# Altium PCB libs.PcbDoc
Units mil, origin at the board's own origin, x right, y up, seen from the top; angles counter-clockwise.
Board outline 2362.2 x 1574.8 mil, 2 copper layers (Top Layer, Bottom Layer); 7 components, 9 nets, 22 pads, 0 vias.
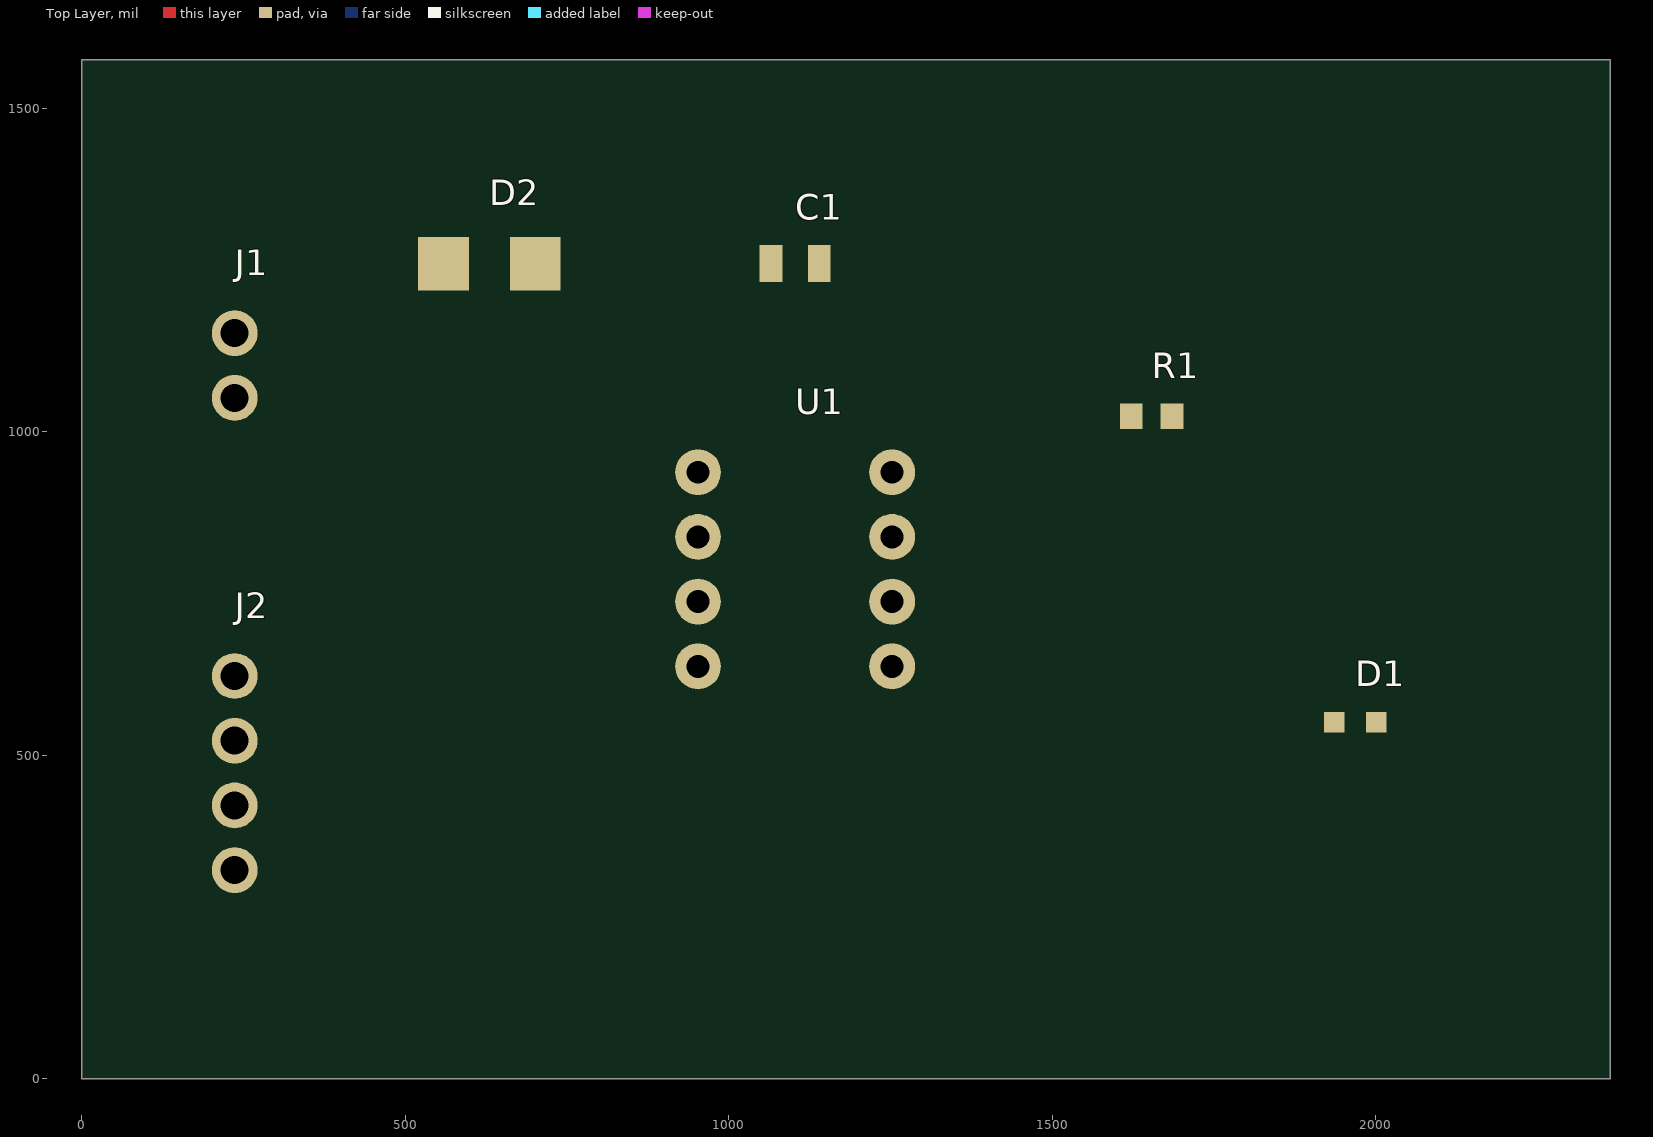
[diagram p0: Top Layer view]
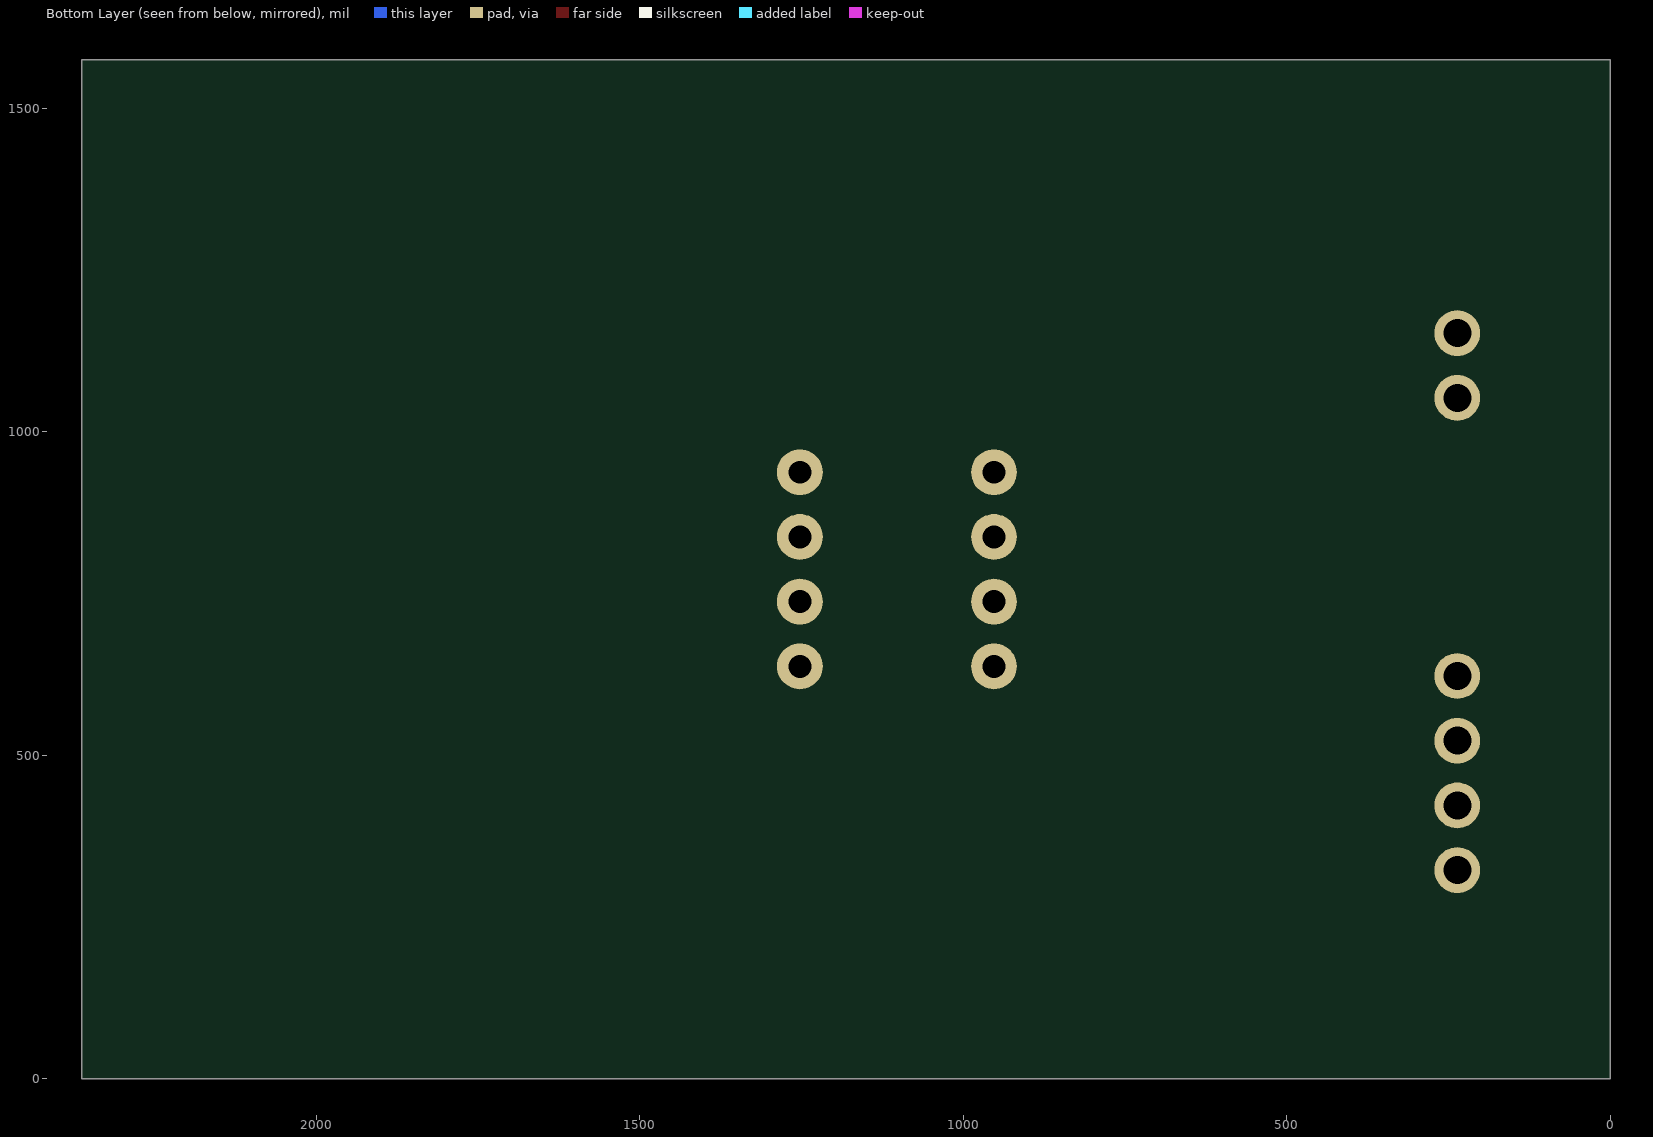
[diagram p1: Bottom Layer view, seen from below]

## Layer stack, top to bottom
Top Solder: solder mask 0.4, Solder Resist, Dk 3.5
Top Layer: signal copper 1.4
Dielectric 1: dielectric 12.6, FR-4, Dk 4.8
Bottom Layer: signal copper 1.4
Bottom Solder: solder mask 0.4, Solder Resist, Dk 3.5

## Board outline
0,1574.8 2362.2,1574.8 2362.2,0 0,0

## Components (designator, comment, footprint, x,y, rotation, side; value= is the part's Value field where it differs from the comment)
C1 "100n" Chip_0805 1102.36,1259.84 r0 top
D1 "red" LED0603_Kingbright_APT1608SURCK 1968.5,551.18 r0 top
D2 "rectifier" DO214AC 629.92,1259.84 r0 top
J1 "SUPPLY" Header_1x2_P2.54 236.22,1102.36 r0 top
J2 "PORT" Header_1x4_P2.54 236.22,472.44 r0 top
R1 "330" Chip_0603 1653.54,1023.62 r0 top
U1 "MCU" DIP8_Microchip_P 1102.36,787.4 r0 top locked

## Footprints (in the part's own frame and the unit in brackets; to place one, negate y for a bottom-side part, rotate by r counter-clockwise, add the part's x,y. Pads: shape width x height; smd on the part's side, far side on the other; paste and mask are expansions set on the pad)
Chip_0603 [mm]
  rect 0.9x1 smd: 1(-0.8,0) 2(0.8,0)
Chip_0805 [mm]
  rect 0.9x1.45 smd: 1(-0.95,0) 2(0.95,0)
DIP8_Microchip_P [mm]
  round 1.8 hole 0.9: 1(-3.81,-3.81) 2(-3.81,-1.27) 3(-3.81,1.27) 4(-3.81,3.81) 5(3.81,3.81) 6(3.81,1.27) 7(3.81,-1.27) 8(3.81,-3.81)
DO214AC [mm]
  rect 2x2.1 smd: 1(-1.8,0) 2(1.8,0)
Header_1x2_P2.54 [mm]
  round 1.8 hole 1.1: 1(0,-1.27) 2(0,1.27)
Header_1x4_P2.54 [mm]
  round 1.8 hole 1.1: 1(0,-3.81) 2(0,-1.27) 3(0,1.27) 4(0,3.81)
LED0603_Kingbright_APT1608SURCK [mm]
  rect 0.8x0.8 smd: 1(-0.825,0) 2(0.825,0)

## Part data
C1: library part Capacitor
D1: library part LED
D2: library part Diode
J1: library part Connector_2
J2: library part Connector_4
R1: library part Resistor
U1: library part Microcontroller

## Nets (pads, with @x,y where several pads share a name; then routed paths per layer and width w, separated by ;. In a path a pad name is that pad's centre, name@x,y a point inside that pad or via, vN(x,y) a via of type N, cw(c..) or ccw(c..) an arc to the next point about the centre after c; other vN are vias at no path point)
GND: C1.2 D1.1 J1.2 U1.8
LED_A: D1.2 R1.2
LED_DRV: R1.1 U1.2
P0: J2.1 U1.3
P1: J2.2 U1.4
P2: J2.3 U1.5
P3: J2.4 U1.6
VCC: C1.1 D2.1 U1.1
VIN: D2.2 J1.1
pads on no net: U1.7